# Altium PCB PDB.PcbDoc (part 3 of 3)
Units mil, origin at the board's own origin, x right, y up, seen from the top; angles counter-clockwise.
Board outline 4724.41 x 3149.61 mil, 2 copper layers (Top Layer, Bottom Layer); 64 components, 33 nets, 163 pads, 36 vias.
Unrouted connection lines stored in the file: 2.
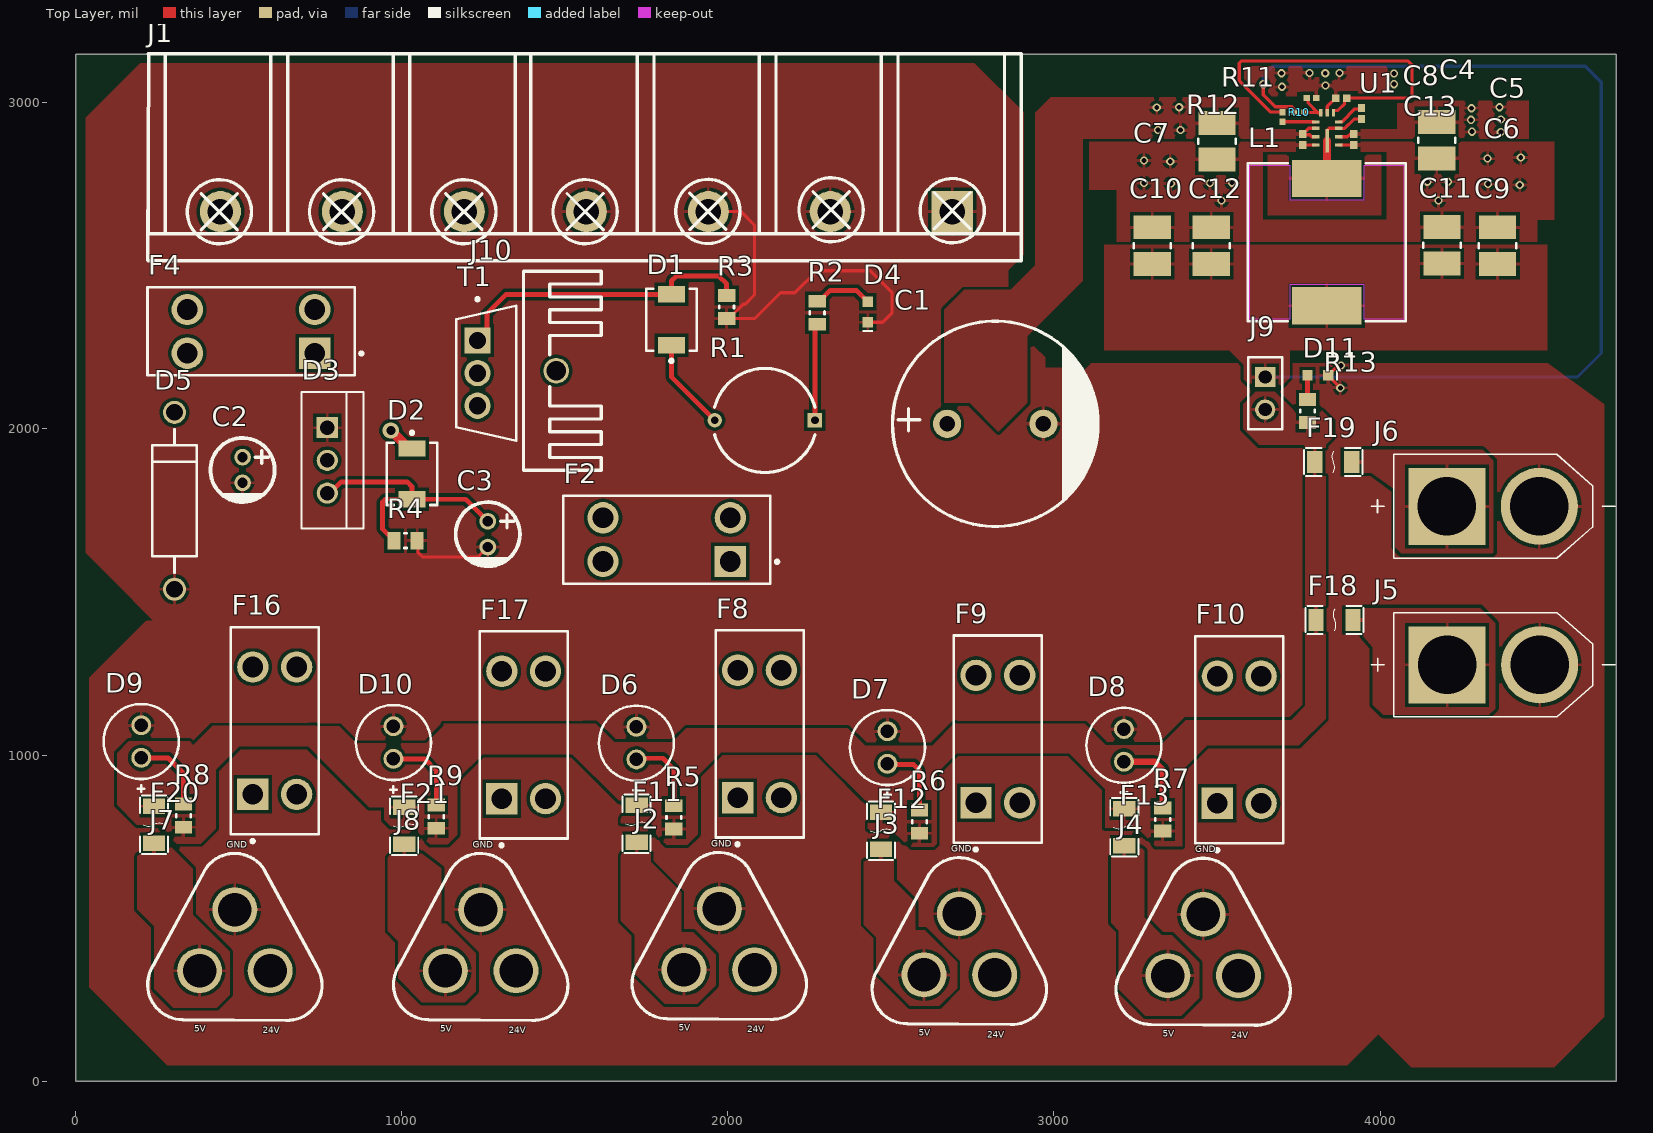
[diagram p0: Top Layer view]

## Part data (continued)
R11: library part RC0805FR-0724K9L, "Res Thick Film 0402 24.9K Ohm 1% 0.063W(1/16W) ±100ppm/C Pad SMD T/R", Case Code (Imperial)=0805, LCSC Part No=C155691, Manufacturer="Yageo Group", Max Operating Temperature=155°C, Max Power Dissipation=63mW, Min Operating Temperature=-55°C, Power Rating=125mW, Temperature Coefficient=100ppm/°C, Tolerance=1%, Voltage Rating=150V, Voltage Rating (DC)=50V, Case/Package=0805, Category="Chip SMD Resistors", China RoHS=Non-Compliant, componentlink1description=https://datasheet.octopart.com:443/RC0805FR-0724K9L-Yageo-datasheet-175887523.pdf?src-supplier=IHS, componentlink1url=https://datasheet.octopart.com:443/RC0805FR-0724K9L-Yageo-datasheet-175887523.pdf?src-supplier=IHS, ComponentLink2Description=https://datasheet.octopart.com:443/RC0805FR-0724K9L-Yageo-datasheet-103092701.pdf?src-supplier=Upverter, ComponentLink2URL=https://datasheet.octopart.com:443/RC0805FR-0724K9L-Yageo-datasheet-103092701.pdf?src-supplier=Upverter, ComponentLink3Description=https://datasheet.octopart.com:443/RC0805FR-0724K9L-Yageo-Group-datasheet-189192902.pdf?src-supplier=TME, ComponentLink3URL=https://datasheet.octopart.com:443/RC0805FR-0724K9L-Yageo-Group-datasheet-189192902.pdf?src-supplier=TME, ComponentLink4Description=https://datasheet.octopart.com:443/RC0805FR-0724K9L-Yageo-Group-datasheet-176638170.pdf?src-supplier=Future+Electronics, ComponentLink4URL=https://datasheet.octopart.com:443/RC0805FR-0724K9L-Yageo-Group-datasheet-176638170.pdf?src-supplier=Future+Electronics, ComponentLink5Description=https://datasheet.octopart.com:443/RC0805FR-0724K9L-Yageo-datasheet-164759695.pdf?src-supplier=Future+Electronics, ComponentLink5URL=https://datasheet.octopart.com:443/RC0805FR-0724K9L-Yageo-datasheet-164759695.pdf?src-supplier=Future+Electronics, ComponentLink6Description=https://datasheet.octopart.com:443/RC0805FR-0724K9L-Yageo-datasheet-12592811.pdf?src-supplier=Future+Electronics, ComponentLink6URL=https://datasheet.octopart.com:443/RC0805FR-0724K9L-Yageo-datasheet-12592811.pdf?src-supplier=Future+Electronics, ComponentLink7Description=https://datasheet.octopart.com:443/RC0805FR-0724K9L-Yageo-datasheet-8330313.pdf?src-supplier=Future+Electronics, ComponentLink7URL=https://datasheet.octopart.com:443/RC0805FR-0724K9L-Yageo-datasheet-8330313.pdf?src-supplier=Future+Electronics, ComponentLink8Description=https://datasheet.octopart.com:443/RC0805FR-0724K9L-Yageo-datasheet-8324252.pdf?src-supplier=Future+Electronics, ComponentLink8URL=https://datasheet.octopart.com:443/RC0805FR-0724K9L-Yageo-datasheet-8324252.pdf?src-supplier=Future+Electronics, ComponentLink9Description=https://datasheet.octopart.com/RC0805FR-0724K9L-Yageo-datasheet-73766026.pdf, ComponentLink9URL=https://datasheet.octopart.com/RC0805FR-0724K9L-Yageo-datasheet-73766026.pdf, ComponentLink10Description=https://datasheet.octopart.com:443/RC0805FR-0724K9L-Yageo-datasheet-118657.pdf?src-supplier=DigiKey, ComponentLink10URL=https://datasheet.octopart.com:443/RC0805FR-0724K9L-Yageo-datasheet-118657.pdf?src-supplier=DigiKey, ComponentLink11Description=http://sigma.octopart.com:80/conflict_mineral_statement/Yageo-company-3.pdf?src-supplier=Compliance+Statements, ComponentLink11URL=http://sigma.octopart.com:80/conflict_mineral_statement/Yageo-company-3.pdf?src-supplier=Compliance+Statements, ComponentLink12Description=http://sigma.octopart.com:80/rohs_statement/Yageo-company-2.pdf?src-supplier=Compliance+Statements, ComponentLink12URL=http://sigma.octopart.com:80/rohs_statement/Yageo-company-2.pdf?src-supplier=Compliance+Statements, ComponentLink13Description=https://datasheet.octopart.com:443/RC0402FR-0724K9L-Yageo-datasheet-175887523.pdf?src-supplier=IHS, ComponentLink13URL=https://datasheet.octopart.com:443/RC0402FR-0724K9L-Yageo-datasheet-175887523.pdf?src-supplier=IHS, ComponentLink14Description=https://datasheet.octopart.com:443/RC0402FR-0724K9L-Yageo-datasheet-103092701.pdf?src-supplier=Upverter, ComponentLink14URL=https://datasheet.octopart.com:443/RC0402FR-0724K9L-Yageo-datasheet-103092701.pdf?src-supplier=Upverter, ComponentLink15Description=https://datasheet.octopart.com:443/RC0402FR-0724K9L-Yageo-datasheet-98239111.pdf?src-supplier=Upverter, ComponentLink15URL=https://datasheet.octopart.com:443/RC0402FR-0724K9L-Yageo-datasheet-98239111.pdf?src-supplier=Upverter, ComponentLink16Description=https://datasheet.octopart.com:443/RC0402FR-0724K9L-Yageo-datasheet-10408619.pdf?src-supplier=Newark, ComponentLink16URL=https://datasheet.octopart.com:443/RC0402FR-0724K9L-Yageo-datasheet-10408619.pdf?src-supplier=Newark, ComponentLink17Description=https://datasheet.octopart.com:443/RC0402FR-0724K9L-Yageo-datasheet-62067350.pdf?src-supplier=Newark, ComponentLink17URL=https://datasheet.octopart.com:443/RC0402FR-0724K9L-Yageo-datasheet-62067350.pdf?src-supplier=Newark, ComponentLink18Description=https://datasheet.octopart.com:443/RC0402FR-0724K9L-Yageo-Group-datasheet-176638170.pdf?src-supplier=Future+Electronics, ComponentLink18URL=https://datasheet.octopart.com:443/RC0402FR-0724K9L-Yageo-Group-datasheet-176638170.pdf?src-supplier=Future+Electronics, ComponentLink19Description=https://datasheet.octopart.com:443/RC0402FR-0724K9L-Yageo-datasheet-164759695.pdf?src-supplier=Future+Electronics, ComponentLink19URL=https://datasheet.octopart.com:443/RC0402FR-0724K9L-Yageo-datasheet-164759695.pdf?src-supplier=Future+Electronics, ComponentLink20Description=https://datasheet.octopart.com:443/RC0402FR-0724K9L-Yageo-datasheet-137700087.pdf?src-supplier=Future+Electronics, ComponentLink20URL=https://datasheet.octopart.com:443/RC0402FR-0724K9L-Yageo-datasheet-137700087.pdf?src-supplier=Future+Electronics, ComponentLink21Description=https://datasheet.octopart.com:443/RC0402FR-0724K9L-Yageo-datasheet-12531192.pdf?src-supplier=Future+Electronics, ComponentLink21URL=https://datasheet.octopart.com:443/RC0402FR-0724K9L-Yageo-datasheet-12531192.pdf?src-supplier=Future+Electronics, ComponentLink22Description=https://datasheet.octopart.com:443/RC0402FR-0724K9L-Yageo-datasheet-8324255.pdf?src-supplier=Future+Electronics, ComponentLink22URL=https://datasheet.octopart.com:443/RC0402FR-0724K9L-Yageo-datasheet-8324255.pdf?src-supplier=Future+Electronics, ComponentLink23Description=https://datasheet.octopart.com:443/RC0402FR-0724K9L-Yageo-Group-datasheet-190382422.pdf?src-supplier=Farnell, ComponentLink23URL=https://datasheet.octopart.com:443/RC0402FR-0724K9L-Yageo-Group-datasheet-190382422.pdf?src-supplier=Farnell, ComponentLink24Description=https://datasheet.octopart.com:443/RC0402FR-0724K9L-Yageo-datasheet-148775077.pdf?src-supplier=TME, ComponentLink24URL=https://datasheet.octopart.com:443/RC0402FR-0724K9L-Yageo-datasheet-148775077.pdf?src-supplier=TME, ComponentLink25Description=https://datasheet.octopart.com/RC0402FR-0724K9L-Yageo-datasheet-73766026.pdf, ComponentLink25URL=https://datasheet.octopart.com/RC0402FR-0724K9L-Yageo-datasheet-73766026.pdf, Composition="Thick Film", Contact Plating=Tin, Depth=1.25mm, Features="Moisture Resistant", Height=500µm, Lead Free="Lead Free", Length=2mm, Lifecycle Status=Production, Manufacturer Package Identifier=RC0805FR-0724K9L, Manufacturer Part Number=RC0805FR-0724K9L, Military Standard=Not, Mounting Technology="Surface Mount", Number of Terminals=2, Number of Terminations=2, Packaging="Tape & Reel", Pricing="15000=0.0017, 75000=0.0016, 150000=0.0016, 500000=0.0015, 1000000=0.0015 (USD)", REACH SVHC=Yes, RoHS=Compliant, Schedule B="8533210045, 8533210045|8533210045, 8533210045|8533210045|8533210045, 8533210045|8533210045|8533210045|8533210045", Stock=5000, Supplier="Future Electronics", Supplier Part Number=RC0805FR-0724K9L, Termination=SMD/SMT, Width=1.25mm, Working Voltage=150V
T1: library part SUP90P06-09L-E3, "Transistor MOSFET P-CH 60V 90A 3-Pin (3+Tab) TO-220AB", Case/Package=TO-220AB, Continuous Drain Current (ID)=90A, Drain to Source Breakdown Voltage=-60V, Drain to Source Resistance=9.3mΩ, Gate to Source Voltage (Vgs)=20V, Input Capacitance=9.2nF, LCSC Part No=C913431, Manufacturer=Vishay, Max Junction Temperature (Tj)=175°C, Max Power Dissipation=250W, Min Breakdown Voltage=60V, Min Operating Temperature=-55°C, Power Dissipation=2.4W, Threshold Voltage=-1V, Category=MOSFETs, China RoHS=Non-Compliant, componentlink1description=https://datasheet.octopart.com:443/SUP90P06-09L-E3-Vishay-datasheet-136806930.pdf?src-supplier=Upverter, componentlink1url=https://datasheet.octopart.com:443/SUP90P06-09L-E3-Vishay-datasheet-136806930.pdf?src-supplier=Upverter, ComponentLink2Description=https://datasheet.octopart.com:443/SUP90P06-09L-E3-Vishay-datasheet-181475598.pdf?src-supplier=Farnell, ComponentLink2URL=https://datasheet.octopart.com:443/SUP90P06-09L-E3-Vishay-datasheet-181475598.pdf?src-supplier=Farnell, ComponentLink3Description=https://datasheet.octopart.com:443/SUP90P06-09L-E3-Vishay-datasheet-5331994.pdf?src-supplier=Farnell, ComponentLink3URL=https://datasheet.octopart.com:443/SUP90P06-09L-E3-Vishay-datasheet-5331994.pdf?src-supplier=Farnell, ComponentLink4Description=https://datasheet.octopart.com:443/SUP90P06-09L-E3-Vishay-datasheet-12554124.pdf?src-supplier=Farnell, ComponentLink4URL=https://datasheet.octopart.com:443/SUP90P06-09L-E3-Vishay-datasheet-12554124.pdf?src-supplier=Farnell, ComponentLink5Description=https://datasheet.octopart.com:443/SUP90P06-09L-E3-Vishay-datasheet-62319295.pdf?src-supplier=element14+APAC, ComponentLink5URL=https://datasheet.octopart.com:443/SUP90P06-09L-E3-Vishay-datasheet-62319295.pdf?src-supplier=element14+APAC, ComponentLink6Description=https://datasheet.octopart.com:443/SUP90P06-09L-E3-Vishay-datasheet-34182708.pdf?src-supplier=Newark, ComponentLink6URL=https://datasheet.octopart.com:443/SUP90P06-09L-E3-Vishay-datasheet-34182708.pdf?src-supplier=Newark, ComponentLink7Description=https://datasheet.octopart.com:443/SUP90P06-09L-E3-Vishay-datasheet-182948809.pdf?src-supplier=Future+Electronics, ComponentLink7URL=https://datasheet.octopart.com:443/SUP90P06-09L-E3-Vishay-datasheet-182948809.pdf?src-supplier=Future+Electronics, ComponentLink8Description=https://datasheet.octopart.com:443/SUP90P06-09L-E3-Vishay-datasheet-44060369.pdf?src-supplier=TME, ComponentLink8URL=https://datasheet.octopart.com:443/SUP90P06-09L-E3-Vishay-datasheet-44060369.pdf?src-supplier=TME, ComponentLink9Description=https://datasheet.octopart.com:443/SUP90P06-09L-E3-Vishay-datasheet-7828879.pdf?src-supplier=Jameco, ComponentLink9URL=https://datasheet.octopart.com:443/SUP90P06-09L-E3-Vishay-datasheet-7828879.pdf?src-supplier=Jameco, ComponentLink10Description=http://sigma.octopart.com:80/rohs_statement/Vishay-company-15.pdf?src-supplier=Compliance+Statements, ComponentLink10URL=http://sigma.octopart.com:80/rohs_statement/Vishay-company-15.pdf?src-supplier=Compliance+Statements, Contact Plating=Tin, Country of Origin=Israel, Drain to Source Voltage (Vdss)=-60V, Element Configuration=Single, Export Control Classification Number (ECCN) Code=EAR99, Fall Time=300ns, Harmonized Tariff Schedule (HTS) Code=8541.29.00.95, Height=19.31mm, Introduction Date=2004-06-15, Lead Free="Lead Free", Length=10.41mm, Lifecycle Status=Production, Manufacturer Part Number=SUP90P06-09L-E3, Max Operating Temperature=175°C, Mounting Technology="Through Hole", Number of Channels=1, Number of Elements=1, Number of Terminals=3, Pins=3, Pricing="50=5.68, 100=5.65, 200=5.62, 750=5.56 (USD)", Radiation Hardening=No, Rds On Max=9.3mΩ, REACH SVHC=No, Rise Time=190ns, RoHS=Compliant, Schedule B="8541290080, 8541290080|8541290080|8541290080|8541290080|8541290080", Stock=50, Supplier="Future Electronics", Supplier Part Number=SUP90P06-09L-E3, Turn-Off Delay Time=140ns, Turn-On Delay Time=20ns, Weight=6.000006g, Width=4.7mm
U1: library part LMR33630BRNXR, "IC REG BUCK ADJUSTABLE 3A 12VQFN / Buck Switching Regulator IC Positive Adjustable 1V 1 Output 3A 12-VFQFN", LCSC Part No=C2071384, Manufacturer="Texas Instruments", Manufacturer Lifecycle Status=ACTIVE, Max Operating Temperature=125°C, Min Operating Temperature=-40°C, Category="Voltage Regulators - Switching", componentlink1description=https://sigma.octopart.com:443/108227172/technical_drawing/Texas-Instruments-LMR33630BRNXR.pdf?src-supplier=Texas+Instruments, componentlink1url=https://sigma.octopart.com:443/108227172/technical_drawing/Texas-Instruments-LMR33630BRNXR.pdf?src-supplier=Texas+Instruments, ComponentLink2Description=https://octopart.com:443/opatz8j6/c1?t=EVqXTc9lPdvh4KM0OMOd6jF6nvDy5iiMa6Ug704xYOEM50ApL5efiiKsondM5tWZXuMkVgDVeHSOWY4K2L4yJ1BDbP8IXnDBSM36LZKtaJIrTmne1BvFg3XbALw5nGtLfaIOBIEiZ444J4F9avIzeyXpDaATm-j-4v7b17r_NykRi2lhYhl8bAqjuH2g8-6CjsgeyyGYXZTl1usI-_kVX2lsvdFDAZQxbVeCyAoTQbYcqwNKC2Z_SfJdxjT-iffmEDohhR-f8cczwCUh22kJFK9zzMNieV0knEERwChZnJsPjR28tudu-k_MGMOPDZL1QnnNd5Grz0jM_2De5P-MOKwDonG2s3yX_9ySz95wkzseGQYe3rwTrSESYgD7i1ybtPA3Sdk&src-supplier=Texas+Instruments, ComponentLink2URL=https://octopart.com:443/opatz8j6/c1?t=EVqXTc9lPdvh4KM0OMOd6jF6nvDy5iiMa6Ug704xYOEM50ApL5efiiKsondM5tWZXuMkVgDVeHSOWY4K2L4yJ1BDbP8IXnDBSM36LZKtaJIrTmne1BvFg3XbALw5nGtLfaIOBIEiZ444J4F9avIzeyXpDaATm-j-4v7b17r_NykRi2lhYhl8bAqjuH2g8-6CjsgeyyGYXZTl1usI-_kVX2lsvdFDAZQxbVeCyAoTQbYcqwNKC2Z_SfJdxjT-iffmEDohhR-f8cczwCUh22kJFK9zzMNieV0knEERwChZnJsPjR28tudu-k_MGMOPDZL1QnnNd5Grz0jM_2De5P-MOKwDonG2s3yX_9ySz95wkzseGQYe3rwTrSESYgD7i1ybtPA3Sdk&src-supplier=Texas+Instruments, ComponentLink3Description=https://sigma.octopart.com:443/103854369/technical_drawing/Texas-Instruments-LMR33630BRNXR.pdf?src-supplier=Texas+Instruments, ComponentLink3URL=https://sigma.octopart.com:443/103854369/technical_drawing/Texas-Instruments-LMR33630BRNXR.pdf?src-supplier=Texas+Instruments, ComponentLink4Description=http://sigma.octopart.com:80/reach_statement/Texas-Instruments-company-64.pdf?src-supplier=Compliance+Statements, ComponentLink4URL=http://sigma.octopart.com:80/reach_statement/Texas-Instruments-company-64.pdf?src-supplier=Compliance+Statements, ComponentLink5Description=http://sigma.octopart.com:80/conflict_mineral_statement/Texas-Instruments-company-63.pdf?src-supplier=Compliance+Statements, ComponentLink5URL=http://sigma.octopart.com:80/conflict_mineral_statement/Texas-Instruments-company-63.pdf?src-supplier=Compliance+Statements, Height=1mm, Length=2mm, Lifecycle Status=Production, Manufacturer Part Number=LMR33630BRNXR, Number of Channels=1, Pins=12, Pricing="1=1.533, 10=1.509, 25=1.486, 100=1.462, 250=1.438, 500=1.415, 1000=1.391 (USD)", RoHS=Compliant, Schedule B="8542390000, 8542390000|8542390000|8542390000|8542390000|8542390000", Stock=2742, Supplier="Arrow Electronics", Supplier Part Number=LMR33630BRNXR, Thickness=900µm, Topology=Buck, Width=3mm

## Via types
v1: diameter 25, hole 15, Top Layer to Bottom Layer, 35 vias
v2: diameter 50, hole 28, Top Layer to Bottom Layer, 1 vias

## Nets (pads, with @x,y where several pads share a name; then routed paths per layer and width w, separated by ;. In a path a pad name is that pad's centre, name@x,y a point inside that pad or via, vN(x,y) a via of type N, cw(c..) or ccw(c..) an arc to the next point about the centre after c; other vN are vias at no path point)
5V: F11.1 F12.1 F13.1 F18.2 F19.2 F20.1 F21.1 J9.2 R5.2 R6.2 R7.2 R8.2 R9.2 R13.2
"5V_Buck Out": C9.2 C10.2 C11.2 C12.2 J9.1 L1.2 R10.2 | length 3142.7
  Top Layer w10: v1(3641.73,3057.09) 3641.73,3024.61 3678.15,2988.19 3729.38,2988.19 3735.24,2982.33 3735.24,2972.75 R10.2
  Bottom Layer w10: v1(3641.73,3057.09) 3641.73,3083.66 3670.28,3112.2 4628.94,3112.2 4678.15,3062.99 4678.15,2231.3 4606.3,2159.45 J9.1
24_In: C1.1 C5.1 C6.1 C7.1 C8.1 F8.2 F9.2 F10.2 F16.2 F17.2 R1.1 R2.2 U1.2 U1.9 U1.10 | length 428.6
  Top Layer w10: U1.10@3802.18,2896.04 3789.98,2896.04 3783.6,2902.42 3765.01,2902.42 C8.1 3763.19,2905.09 3769.46,2911.36 3770.3,2911.36 3780.6,2921.66 U1.9 ; U1.2@3873.04,2896.04 3873.12,2896.12 3899.85,2896.12 3908.02,2904.28 C6.1@3912.03,2904.28
  Top Layer w15: R1.1 2266.73,2313.75 R2.2
  other v1: 4370.08,2910.43 4281.5,2911.42 3318.9,2916.34 3387.8,2916.34 4278.54,2947.83 4370.08,2948.82 4280.51,2983.27 3314.96,2985.24 3383.86,2986.22 4366.14,2986.22
GND: C1.2 C2.2 C3.2 C5.2 C6.2 C7.2 C8.2 C9.1 C10.1 C11.1 C12.1 C13.2 D3.1 D4.1 D5.2 D6.2 D7.2 D8.2 D9.2 D10.2 D11.1 J1.1 J1.2 J1.3 J1.4 J2.2 J3.2 J4.2 J5.2 J6.2 J7.2 J8.2 R3.1 R4.1 R11.2 U1.1 U1.6 U1.11 | length 1741.8
  Top Layer w10: R4.1 1049.5,1655.23 1049.5,1621.76 1063.98,1607.28 1233.27,1607.28 C3.2 ; J1.3 2040.35,2666.34 2081.69,2625 2081.69,2411.42 2052.62,2382.34 2046.71,2382.34 2002.95,2338.58 R3.1 2082.68,2338.58 2161.42,2417.32 2205.71,2417.32 2273.62,2485.24 2437.01,2485.24 2502.95,2419.29 2502.95,2355.32 2474.41,2326.77 D4.1 ; C8.2 U1.11@3802.15,2870.48 ; U1.6 3837.61,2988.84 3863.13,3014.36 C13.2 ; D11.1@3840.55,2163.39 3841.53,2163.39 3851.3,2153.62 3851.3,2152.64 v1(3877.95,2125.98) ; D11.1 3871.06,2194.88 v1(3879.92,2194.88) ; U1.1@3873.04,2870.45 3879.77,2870.45 3879.86,2870.54 C6.2@3912.03,2870.54
  other v1: 3513.78,2700.79 4179.13,2700.79 4428.15,2748.03 4330.71,2750.98 3358.27,2752.95 3275.59,2753.94 3478.35,2753.94 3546.26,2754.92 4144.69,2757.87 4208.66,2757.87 3356.3,2819.88 3275.59,2822.83 4329.72,2828.74 4431.1,2832.68 3698.82,3049.21 3832.68,3053.15 4042.32,3057.09 4042.32,3089.57 3697.83,3090.55 3831.69,3090.55 3783.46,3091.54 3875,3091.54
NetC2_1: C2.1 D2.1 D3.2 D5.1 F2.2 F4.2 T1.2 | length 91.5
  Top Layer w30: v2(966.54,1995.08) 1004.96,1956.65 1004.96,1950.16 1014.96,1940.16 D2.1
NetC3_1: C3.1 D2.2 D3.3 R4.2 | length 809.5
  Top Layer w15: D3.3 780.51,1803.15 814.96,1837.6 1016.73,1837.6 1031.37,1822.97 1031.37,1784.38 D2.2 ; R4.2 976.38,1664.37 964.19,1676.56 957.3,1676.56 941.34,1692.52 941.34,1775.46 950.13,1784.25 D2.2 ; C3.1 1196.06,1784.25 D2.2
NetC4_1: C4.1 U1.4 | length 86.4
  Top Layer w10: U1.4@3873.98,2942.31 3883.7,2942.31 3922.5,2981.11 3939.64,2981.11 C4.1
NetC4_2: C4.2 L1.1 U1.3 U1.12 | length 255.7
  Top Layer w10: L1.1 L1.1@3837.61,2768.53 ; U1.12 3837.61,2915.77 3843.47,2921.63 U1.3@3873.04,2921.63 ; U1.3@3879.92,2921.39 3891.07,2921.39 3919.99,2950.32 C4.2@3937.13,2950.32
  Top Layer w25: L1.1@3837.61,2768.53 U1.12
NetC13_1: C13.1 R12.1 U1.5 | length 1124.5
  Top Layer w10: R12.1@3700.29,2971.46 3664.37,2971.46 3567.91,3067.91 3567.91,3122.09 3573.77,3127.95 4085.63,3127.95 4097.88,3115.7 4097.88,3020.22 4092.02,3014.36 C13.1 ; U1.5@3857.74,2976.38 3870.1,2976.38 3891.09,2997.37 3891.09,3008.58 3897.36,3014.85 C13.1@3897.72,3014.85
NetD1_1: D1.1 F2.1 R1.2 T1.3 | length 285.2
  Top Layer w15: D1.1 1826.77,2159.45 R1.2
NetD1_2: D1.2 R3.2 T1.1 | length 946.2
  Top Layer w15: T1.1 1260.83,2299.76 1260.83,2353.35 1320.08,2412.6 D1.2 1826.77,2453.74 1841.54,2468.5 1972.44,2468.5 1996.06,2444.88 R3.2
NetD4_2: D4.2 R2.1 | length 183.8
  Top Layer w15: R2.1 2280.63,2391.62 2313.98,2424.97 2393.93,2424.97 D4.2
NetD6_1: D6.1 R5.1 | length 242.8
  Top Layer w15: D6.1 1723.11,990.16 1801.18,990.16 1834.51,956.83 R5.1
NetD7_1: D7.1 R6.1 | length 228.3
  Top Layer w15: D7.1 2490.98,971.46 2568.9,971.46 2587.36,953 R6.1
NetD8_1: D8.1 R7.1 | length 246.7
  Top Layer w20: D8.1 3214.72,979.33 3309.06,979.33 3333.66,954.72 R7.1
NetD9_1: D9.1 R8.1 | length 243.8
  Top Layer w15: D9.1 283.15,991.46 330.71,943.9 R8.1
NetD10_1: D10.1 R9.1 | length 252.2
  Top Layer w15: D10.1 1069.66,988.41 1105.98,952.09 R9.1
NetD11_2: D11.2 R13.1 | length 73.8
  Top Layer w15: R13.1 D11.2
NetF8_1: F8.1 J2.3
NetF9_1: F9.1 J3.3
NetF10_1: F10.1 J4.3
NetF11_2: F11.2 J2.1
NetF12_2: F12.2 J3.1
NetF13_2: F13.2 J4.1
NetF16_1: F16.1 J7.3
NetF17_1: F17.1 J8.3
NetF18_1: F18.1 J5.1
NetF19_1: F19.1 J6.1
NetF20_2: F20.2 J7.1
NetF21_2: F21.2 J8.1
NetR10_1: R10.1 R11.1 U1.7 | length 120.7
  Top Layer w10: R10.1 3767.07,2970.44 3817.84,2970.44 3817.92,2970.36 U1.7 ; R11.1 3775.29,3014.76 3779.15,3010.91 3779.15,2999.39 3808.68,2969.86 U1.7@3817.84,2969.86
NetR12_2: R12.2 U1.8 | length 102.1
  Top Layer w10: R12.2 3794.98,2941.81 3795.44,2941.34 U1.8
V+: F4.1 J1.5 J1.6 J1.7
pads on no net: J10.1

## Polygon pours and split planes (outlines as drawn)
GND on Top Layer "Main" (solid, pour order 55): 2972.44,2219.49 2859.25,2332.68 2859.25,2486.22 2907.48,2534.45 2907.48,2970.47 2755.91,3122.05 198.82,3122.05 30.51,2953.74 30.51,1620.08 322.83,1327.76 2808.07,1327.76 2972.44,1492.13 2972.44,1978.35
GND on Top Layer "Main" (solid, pour order 57): 2956.69,2043.31 3495.08,1504.92 3789.37,1210.63 3789.37,934.06 3891.73,831.69 3891.73,247.05 4095.47,43.31 4533.46,43.31 4687.99,197.83 4687.99,2075.57 4513.78,2200.79 3114.17,2200.79
GND on Top Layer "Main" (solid, pour order 56): 217.52,1412.4 2583.66,1412.4 2943.9,1772.64 2943.9,1971.46 2937.01,1978.35 2937.01,2187.01 3082.68,2187.01 3082.68,2011.81 4101.38,993.11 4101.38,250.98 3899.61,49.21 280.51,49.21 42.32,287.4 42.32,1237.2 215.55,1410.43
GND on Top Layer "Main" (solid, pour order 59): 3343.5,682.09 3523.62,682.09 3569.88,635.83 3569.88,488.19 3484.25,402.56 3428.15,402.56 3364.17,466.54 3348.43,466.54 3299.21,515.75 3299.21,637.8
GND on Top Layer "Main" (solid, pour order 34): 3877.95,3008.86 3794.29,3008.86 3794.29,3033.46 3744.09,3033.46 3744.09,3019.68 3575.79,3019.68 3575.79,3114.17 4088.58,3114.17 4088.58,3029.53 3933.07,3029.53 3933.07,3036.42 3877.95,3036.42
"5V_Buck Out" on Top Layer "Main" (solid, pour order 29): 4511.81,2241.14 3153.54,2241.14 3153.54,2563.98 4511.81,2563.98
GND on Top Layer "Main" (solid, pour order 30): 4481.3,2572.83 3192.91,2572.83 3192.91,2733.27 3108.27,2733.27 3108.27,2879.92 3783.46,2879.92 3783.46,2861.22 3783.46,2850.39 3639.76,2850.39 3639.76,2641.73 4019.68,2641.73 4019.68,2850.39 3888.78,2850.39 3895.67,2873.03 3888.78,2866.14 3888.78,2867.13 3888.78,2879.92 4533.46,2879.92 4533.46,2641.73 4481.3,2641.73
NetC4_2 on Top Layer "Main" (solid, pour order 31): 3852.36,2840.55 3823.82,2840.55 3655.51,2840.55 3655.51,2655.51 4003.94,2655.51 4003.94,2837.6 4000.98,2840.55
24_In on Top Layer "Main" (solid, pour order 32): 3912.03,2885.83 3912.03,2919.29 4053.15,2919.29 4053.15,3006.89 4455.71,3006.89 4455.71,2885.83
24_In on Top Layer "Main" (solid, pour order 33): 3269.68,2863.19 3269.68,3016.73 3598.43,3016.73 3598.43,2918.31 3818.9,2918.31 3818.9,2863.19
"5V_Buck Out" on Top Layer "Main" (solid, pour order 35): 3606.3,2126.97 3692.91,2126.97 3722.44,2156.5 3722.44,2243.11 3759.84,2280.51 3759.84,2304.13 3538.39,2304.13 3538.39,2240.16 3581.69,2196.85 3581.69,2151.57
24_In on Top Layer "Main" (solid, pour order 36): 2663.39,2079.72 2663.39,2365.16 2724.41,2426.18 2867.13,2426.18 2942.91,2501.97 2942.91,2969.49 2990.16,3016.73 3278.54,3016.73 3278.54,2890.12 3087.6,2890.12 3087.6,2453.74 2918.31,2284.45 2918.31,2079.72 2829.72,1991.14 2741.14,2079.72
NetF18_1 on Top Layer "5_out" (solid, pour order 1): 3904.53,1415.85 3977.85,1330.22 3977.85,1154.53 4009.35,1123.03 4333.66,1123.03 4353.35,1142.72 4353.35,1404.53 4307.09,1450.79 3919.29,1450.79
NetF19_1 on Top Layer "5V_2" (solid, pour order 2): 3876.97,1866.14 3876.97,1936.02 4313.98,1936.02 4347.44,1902.56 4347.44,1621.06 4344.49,1618.11 4064.96,1618.11 4046.26,1636.81 4046.26,1812.99 3972.59,1866.14
5V on Top Layer "Main" (solid, pour order 20): 717.52,1089.57 420.28,1089.57 361.22,1030.51 349.41,1042.32 163.39,1042.32 126.97,1005.91 126.97,847.44 187.99,786.42 275.59,786.42 275.59,762.8 310.04,728.35 383.86,728.35 430.12,774.61 430.12,955.71 431.1,955.71 501.97,1026.57 733.27,1026.57 733.27,1072.83 749.02,1088.58 747.05,1090.55 716.54,1090.55
5V on Top Layer "Main" (solid, pour order 19): 1170.28,925.2 1245.08,1000 1245.08,1001.97 1523.62,1001.97 1530.51,995.08 1530.51,1054.13 1532.48,1054.13 1567.91,1089.57 1562.01,1095.47 1128.94,1095.47 1128.94,1089.57 1074.8,1035.43 861.22,1035.43 809.06,1087.6 734.25,1087.6 692.91,1046.26 899.61,839.57 945.87,839.57 945.87,801.18 965.55,781.5 1040.35,781.5 1050.2,771.65 1050.2,762.8 1086.61,726.38 1141.73,726.38 1170.28,754.92 1170.28,927.17
5V on Top Layer "Main" (solid, pour order 18): 2329.72,1055.12 2302.17,1082.68 1873.03,1082.68 1829.72,1039.37 1651.57,1039.37 1594.49,1096.46 1559.06,1096.46 1516.73,1054.13 1516.73,1008.86 1672.24,853.35 1672.24,789.37 1673.23,790.35 1762.8,790.35 1780.02,773.13 1780.02,756.4 1812.01,724.41 1875,724.41 1907.48,756.89 1907.48,937.01 1981.3,1010.83 1983.27,1008.86 2275.59,1008.86 2275.59,1006.89 2315.94,966.54 2355.32,1005.91 2355.32,1056.1 2337.6,1056.1
5V on Top Layer "Main" (solid, pour order 17): 3450.79,1107.28 3727.36,1107.28 3770.67,1150.59 3770.67,1945.87 3765.75,1950.79 3628.94,1950.79 3579.72,2000 3579.72,2075.79 3618.11,2114.17 3677.17,2114.17 3735.24,2056.1 3821.85,2056.1 3854.33,2023.62 3854.33,1972.44 3832.68,1950.79 3832.68,1111.22 3750.98,1029.53 3483.27,1029.53 3483.27,1074.8
5V on Top Layer "Main" (solid, pour order 15): 2639.76,727.36 2630.91,718.5 2555.01,718.5 2502.95,768.7 2436.02,768.7 2429.13,775.59 2429.13,853.35 2296.26,986.22 2296.26,1082.68 2367.13,1082.68 2421.26,1028.54 2625.98,1028.54 2695.87,1098.43 2698.82,1095.47 3097.44,1095.47 3047.24,1045.28 3047.24,1005.91 2701.77,1005.91 2639.76,943.9
5V on Top Layer "Main" (solid, pour order 14): 3200.79,1029.53 3201.77,1030.51 3327.76,1030.51 3404.53,1107.28 3470.47,1107.28 3491.14,1086.61 3483.27,1078.74 3483.27,1029.53 3469.49,1029.53 3392.72,952.76 3392.72,720.47 3312.01,720.47 3255.91,776.57 3156.5,776.57 3156.5,895.67 3047.24,1004.92 3047.24,1064.96 3077.76,1095.47 3094.49,1095.47 3159.45,1030.51 3197.83,1030.51
NetF20_2 on Top Layer "5_M1" (solid, pour order 12): 207.68,744.09 266.73,744.09 359.25,651.57 359.25,509.84 472.44,396.65 472.44,265.75 432.09,225.39 299.21,225.39 241.14,283.46 241.14,474.41 188.98,526.57 188.98,725.39
NetF21_2 on Top Layer "5_M2" (solid, pour order 10): 1010.83,736.22 957.68,712.6 957.68,460.63 989.17,429.13 989.17,314.96 1062.01,242.13 1193.9,242.13 1227.36,275.59 1227.36,391.73 1136.81,482.28 1121.06,482.28 1121.06,652.73
NetF12_2 on Top Layer "24_M5" (solid, pour order 5): 2469.97,735.73 2508.86,696.85 2508.86,615.16 2574.8,549.21 2574.8,462.6 2604.33,462.6 2702.76,364.17 2702.76,285.43 2648.62,231.3 2558.07,231.3 2455.71,333.66 2455.71,441.93 2417.32,480.31 2417.32,564.96 2417.32,699.69
NetF11_2 on Top Layer "24_M5" (solid, pour order 7): 1720.47,748.03 1762.8,705.71 1762.8,672.24 1856.3,578.74 1856.3,456.69 1893.7,456.69 1962.6,387.8 1962.6,294.29 1905.51,237.2 1807.09,237.2 1714.57,329.72 1714.57,450.79 1713.58,450.79 1672.24,492.13 1672.24,699.8
NetF13_2 on Top Layer "5V_M5" (solid, pour order 3): 3175.2,722.44 3218.5,741.14 3237.2,741.14 3242.13,741.14 3276.57,706.69 3276.57,501.97 3330.71,447.83 3361.22,447.83 3445.87,363.19 3445.87,255.91 3390.75,200.79 3280.51,200.79 3198.82,282.48 3198.82,461.61 3175.2,485.24
NetC2_1 on Bottom Layer "Main" (solid, pour order 25): 1209.15,1940.45 1340.55,1809.06 1660.43,1809.06 1795.28,1674.21 1795.28,1488.19 1409.45,1488.19 1310.04,1587.6 1310.04,1722.44 1304.13,1722.44 1169.29,1857.28 1064.96,1857.28 1064.96,1880.91 1124.51,1940.45
V+ on Bottom Layer "Main" (solid, pour order 22): 483.27,2478.35 622.05,2339.57 622.05,2480.31 463.58,2513.78
V+ on Bottom Layer "Main" (solid, pour order 23): 898.62,2389.76 973.43,2464.57 952.76,2485.24 819.88,2485.24 819.88,2470.47 901.57,2388.78
V+ on Bottom Layer "Main" (solid, pour order 21): 1280.51,2953.74 1401.57,2832.68 1401.57,2589.57 1250.98,2438.98 910.43,2438.98 910.43,2224.41 831.69,2145.67 659.45,2145.67 527.56,2277.56 527.56,2477.36 357.28,2477.36 206.69,2627.95 206.69,2855.32 305.12,2953.74
NetC2_1 on Bottom Layer "Main" (solid, pour order 28): 437.01,2457.68 478.35,2416.34 478.35,2285.43 681.1,2082.68 848.43,2082.68 980.32,2214.57 980.32,2344.49 1031.5,2395.67 1289.37,2395.67 1368.11,2316.93 1368.11,2172.24 1335.63,2139.76 1177.17,2139.76 1070.87,2033.46 1070.87,2009.84 1144.68,1936.02 1144.68,1935.04 1065.94,1856.3 711.61,1856.3 357.28,1856.3 214.57,1999.02 214.57,2399.61 272.64,2457.68
NetF17_1 on Bottom Layer "24_M2" (solid, pour order 9): 1201.77,816.93 1201.77,913.39 1272.64,984.25 1489.17,984.25 1609.25,864.17 1609.25,353.35 1477.36,221.46 1302.17,221.46 1250.98,272.64 1250.98,383.86 1369.09,501.97 1369.09,680.12 1270.67,778.54 1226.38,778.54 1226.38,792.32
NetF10_1 on Bottom Layer "24_M5" (solid, pour order 4): 3465.55,359.25 3465.55,251.97 3522.64,194.88 3732.28,194.88 3871.06,333.66 3871.06,812.01 3693.9,989.17 3467.52,989.17 3414.37,936.02 3414.37,759.84 3467.52,706.69 3530.51,706.69 3589.57,647.64 3589.57,483.27
NetF9_1 on Bottom Layer "24_M4" (solid, pour order 6): 2659.45,779.53 2724.41,714.57 2724.41,709.65 2802.17,709.65 2861.22,650.59 2861.22,444.88 2789.37,444.88 2723.43,378.94 2723.43,258.86 2768.7,213.58 3008.86,213.58 3010.83,211.61 3125,325.79 3125,838.58 2980.31,983.27 2705.71,983.27 2659.45,937.01 2659.45,914.37
NetF8_1 on Bottom Layer "24_M5" (solid, pour order 8): 1922.24,909.45 2002.95,990.16 2231.3,990.16 2363.19,858.27 2363.19,360.24 2244.09,241.14 2046.26,241.14 1987.2,300.2 1987.2,396.65 2101.38,510.83 2101.38,680.12 2019.69,761.81 1956.69,761.81 1956.69,778.54 1922.24,812.99 1922.24,908.46
NetF16_1 on Bottom Layer "24_M1" (solid, pour order 11): 718.5,987.2 870.08,835.63 870.08,363.19 741.14,234.25 544.29,234.25 493.11,285.43 493.11,396.65 612.2,515.75 612.2,695.87 535.43,772.64 452.76,772.64 452.76,940.94 499.02,987.2
24_In on Bottom Layer "Main" (solid, pour order 13): 2187.99,2000 2187.99,2069.88 2247.05,2128.94 2736.22,2128.94 2834.65,2030.51 2834.65,1779.53 3028.54,1779.53 3344.49,1463.58 3625.98,1463.58 3739.17,1350.39 3739.17,1142.72 129.92,1142.72 129.92,1328.74 253.94,1452.76 2123.03,1452.76 2187.99,1517.72
NetD1_1 on Bottom Layer "Main" (solid, pour order 24): 1166.34,2092.52 1190.94,2117.13 1656.5,2117.13 2069.88,2117.13 2137.8,2049.21 2137.8,1845.47 2137.8,1529.53 2098.43,1490.16 1881.89,1490.16 1881.89,1653.54 1689.96,1845.47 1344.49,1845.47 1197.83,1992.13 1166.34,2020.67
NetC2_1 on Bottom Layer "Main" (solid, pour order 26): 1237.2,1912.4 1236.22,1912.4 1084.65,2063.98 1066.93,2046.26 1066.93,2009.84 1070.87,2009.84 1129.92,1950.79 1129.92,1909.45 1232.28,1909.45 1236.22,1913.39
NetC2_1 on Bottom Layer "Main" (solid, pour order 27): 1139.76,2102.36 1138.78,2101.38 1138.78,1992.13 1075.79,2055.12 1124.02,2103.35 1139.76,2103.35
GND on Bottom Layer "Main" (solid, pour order 58): 2879.92,2160.43 2772.64,2267.72 2772.64,2860.24 3040.35,3127.95 4586.61,3127.95 4688.98,3025.59 4687.01,3023.62 4687.01,2200.79 4646.65,2160.43
24_In on Bottom Layer "Main" (solid, pour order 50): 3109.25,3018.7 4527.4,3018.7 4527.4,2881.89 3109.25,2881.89
no net on Bottom Solder "NONET_L-01_P-001" (solid): 831.69,1960.63 831.69,1900.59 ccw(c862.2,1900.59) 862.2,1870.08 1130.32,1870.08 cw(c1130.32,1775.99) 1196.85,1842.52 1296.51,1742.86 cw(c1237.7,1684.06) 1320.87,1684.06 1320.87,1643.78 ccw(c1420.87,1643.78) 1350.16,1573.07 1384.15,1539.07 ccw(c1454.72,1609.64) 1454.72,1509.84 1510.83,1509.84 ccw(c1510.83,1550.2) 1551.18,1550.2 1551.18,1754.92 ccw(c1523.62,1754.92) 1523.62,1782.48 1398.7,1782.48 cw(c1398.7,1882.48) 1327.99,1811.77 1153.31,1986.46 cw(c1224.02,2057.17) 1124.02,2057.17 1124.02,2071.84 cw(c1221.47,2071.84) 1152.56,2140.75 ccw(c1114.54,2178.77) 1168.31,2178.77 1168.31,2335.63 ccw(c1126.97,2335.63) 1126.97,2376.97 1063.98,2376.97 ccw(c1063.98,2314.96) 1001.97,2314.96 1001.97,2255 cw(c901.97,2255) 972.68,2184.29 858.03,2069.64 ccw(c928.74,1998.93) 828.74,1998.93 828.74,1991.14
no net on Bottom Solder "NONET_L-01_P-001" (solid): 425.2,2254.92 425.2,2202.76 cw(c382.87,2202.76) 382.87,2160.43 ccw(c382.87,2131.89) 354.33,2131.89 354.33,2057.09 ccw(c440.94,2057.09) 440.94,1970.47 539.37,1970.47 cw(c539.37,1929.13) 580.71,1929.13 580.71,1899.61 ccw(c605.32,1899.61) 605.32,1875 663.39,1875 ccw(c663.39,1917.32) 705.71,1917.32 705.71,2038.39 ccw(c682.09,2038.39) 682.09,2062.01 469.49,2274.61 446.85,2274.61 ccw(c446.85,2246.09) 426.69,2266.25 424.21,2263.78

## Text inside footprints (layer, text, board x,y; h text height)
D3: Mechanical 13 "TAB" at 839.65,1922.29 h25 r270
J2: Top Overlay "5V" at 1849.25,154.45 h20; Top Overlay "24V" at 2059.25,149.45 h20; Top Overlay "GND" at 1949.25,719.45 h20; Bottom Overlay "24V" at 2113.64,236.66 h20; Bottom Overlay "5V" at 1878.64,241.66 h20; Bottom Overlay "GND" at 1998.64,616.66 h20
J3: Top Overlay "5V" at 2585.25,138.7 h20; Top Overlay "24V" at 2795.25,133.7 h20; Top Overlay "GND" at 2685.25,703.7 h20; Bottom Overlay "24V" at 2849.65,220.91 h20; Bottom Overlay "5V" at 2614.65,225.91 h20; Bottom Overlay "GND" at 2734.65,600.91 h20
J4: Top Overlay "5V" at 3333.12,136.51 h20; Top Overlay "24V" at 3543.12,131.51 h20; Top Overlay "GND" at 3433.12,701.51 h20; Bottom Overlay "24V" at 3597.51,218.72 h20; Bottom Overlay "5V" at 3362.51,223.72 h20; Bottom Overlay "GND" at 3482.51,598.72 h20
J7: Top Overlay "5V" at 363.8,151.5 h20; Top Overlay "24V" at 573.8,146.5 h20; Top Overlay "GND" at 463.8,716.5 h20; Bottom Overlay "24V" at 628.19,233.7 h20; Bottom Overlay "5V" at 393.19,238.7 h20; Bottom Overlay "GND" at 513.19,613.7 h20
J8: Top Overlay "5V" at 1117.73,151.38 h20; Top Overlay "24V" at 1327.73,146.38 h20; Top Overlay "GND" at 1217.73,716.38 h20; Bottom Overlay "24V" at 1382.13,233.59 h20; Bottom Overlay "5V" at 1147.13,238.59 h20; Bottom Overlay "GND" at 1267.13,613.59 h20